# Altium PCB Main_Board.PcbDoc
Units mm, origin at the board's own origin, x right, y up, seen from the top; angles counter-clockwise.
Board outline 40 x 45.99 mm, 4 copper layers (L1, PWR, GND, L4), stack 0.603 mm thick; 55 components, 45 nets, 223 pads, 78 vias.
Unrouted connection lines stored in the file: 2.
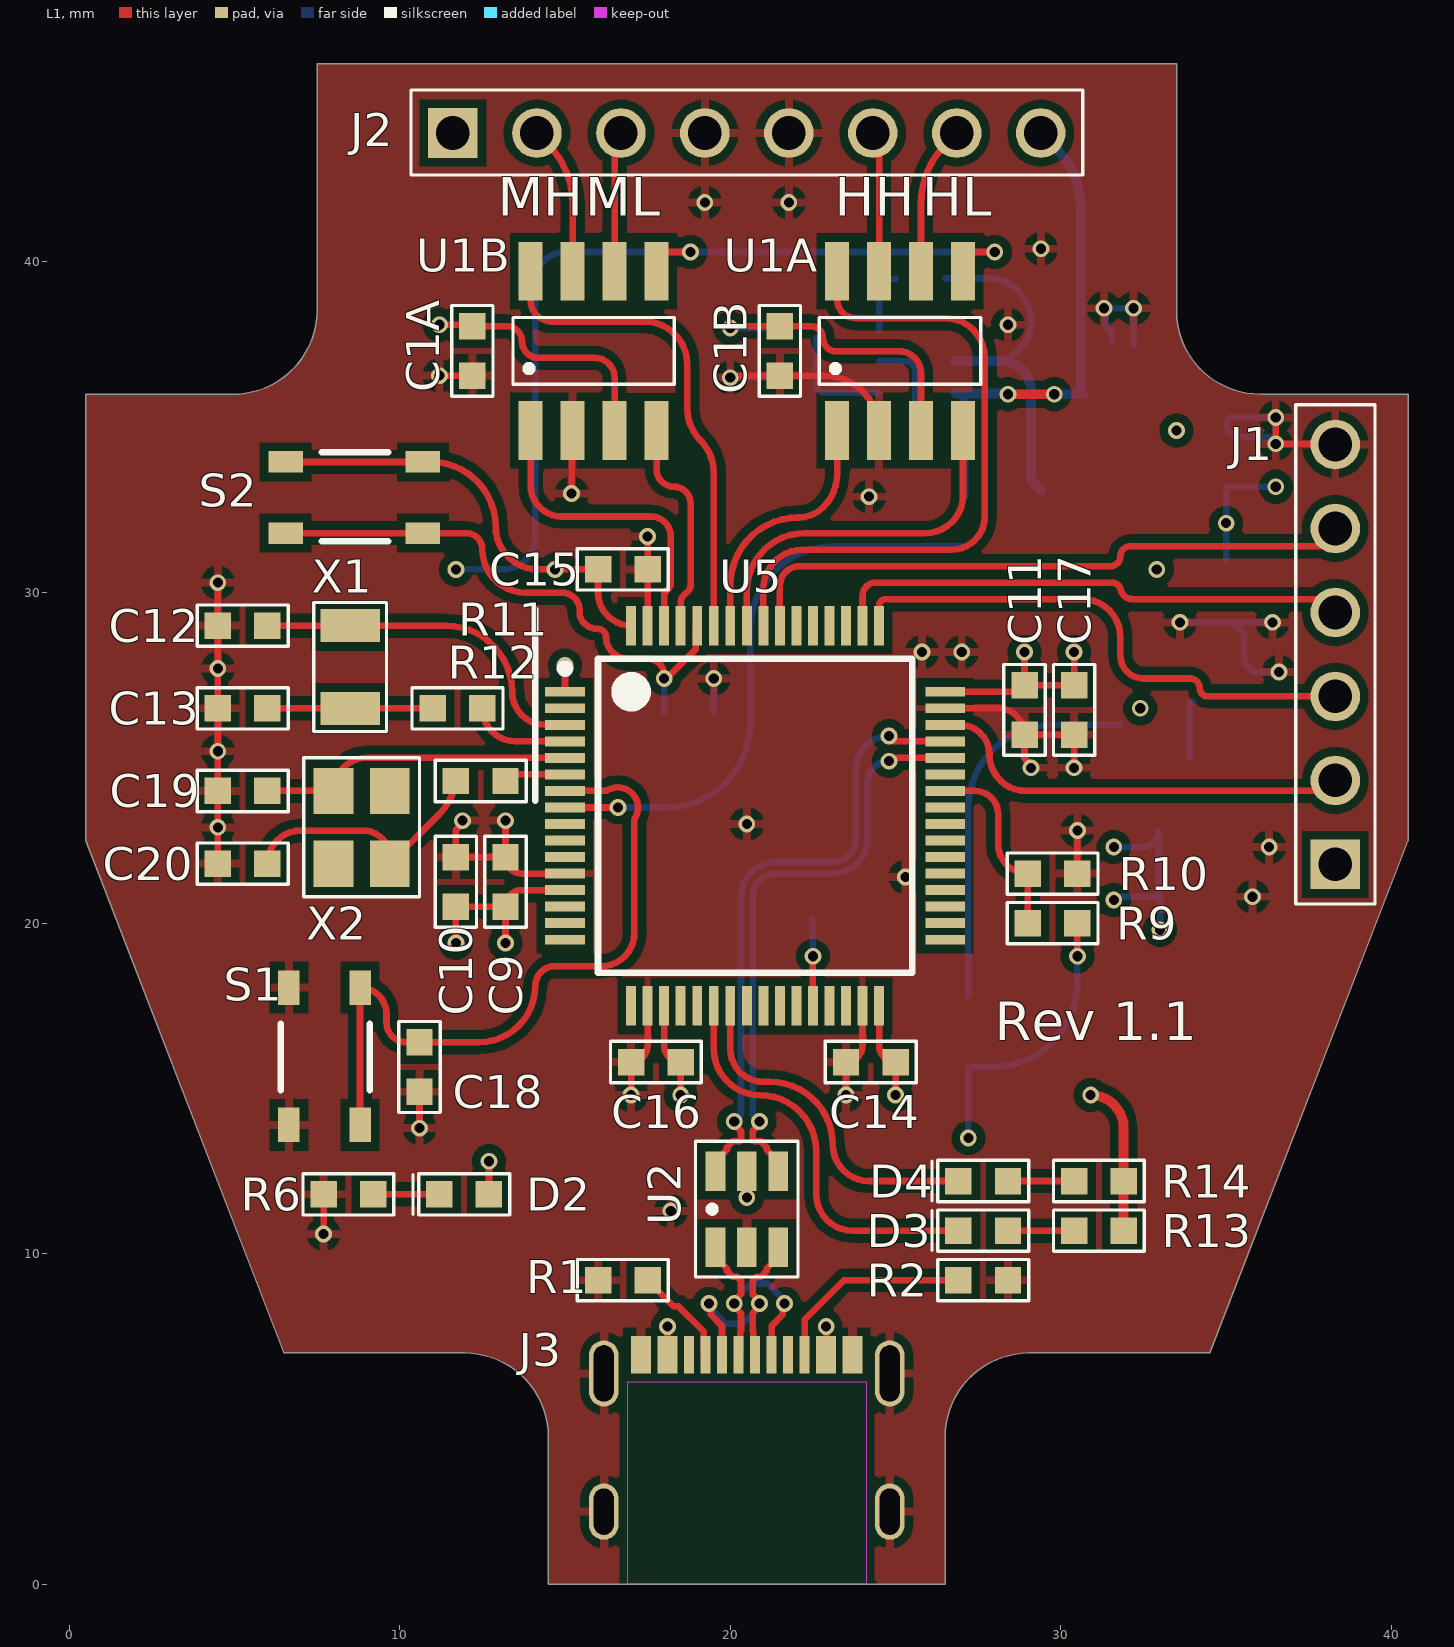
[diagram p0: L1 view]
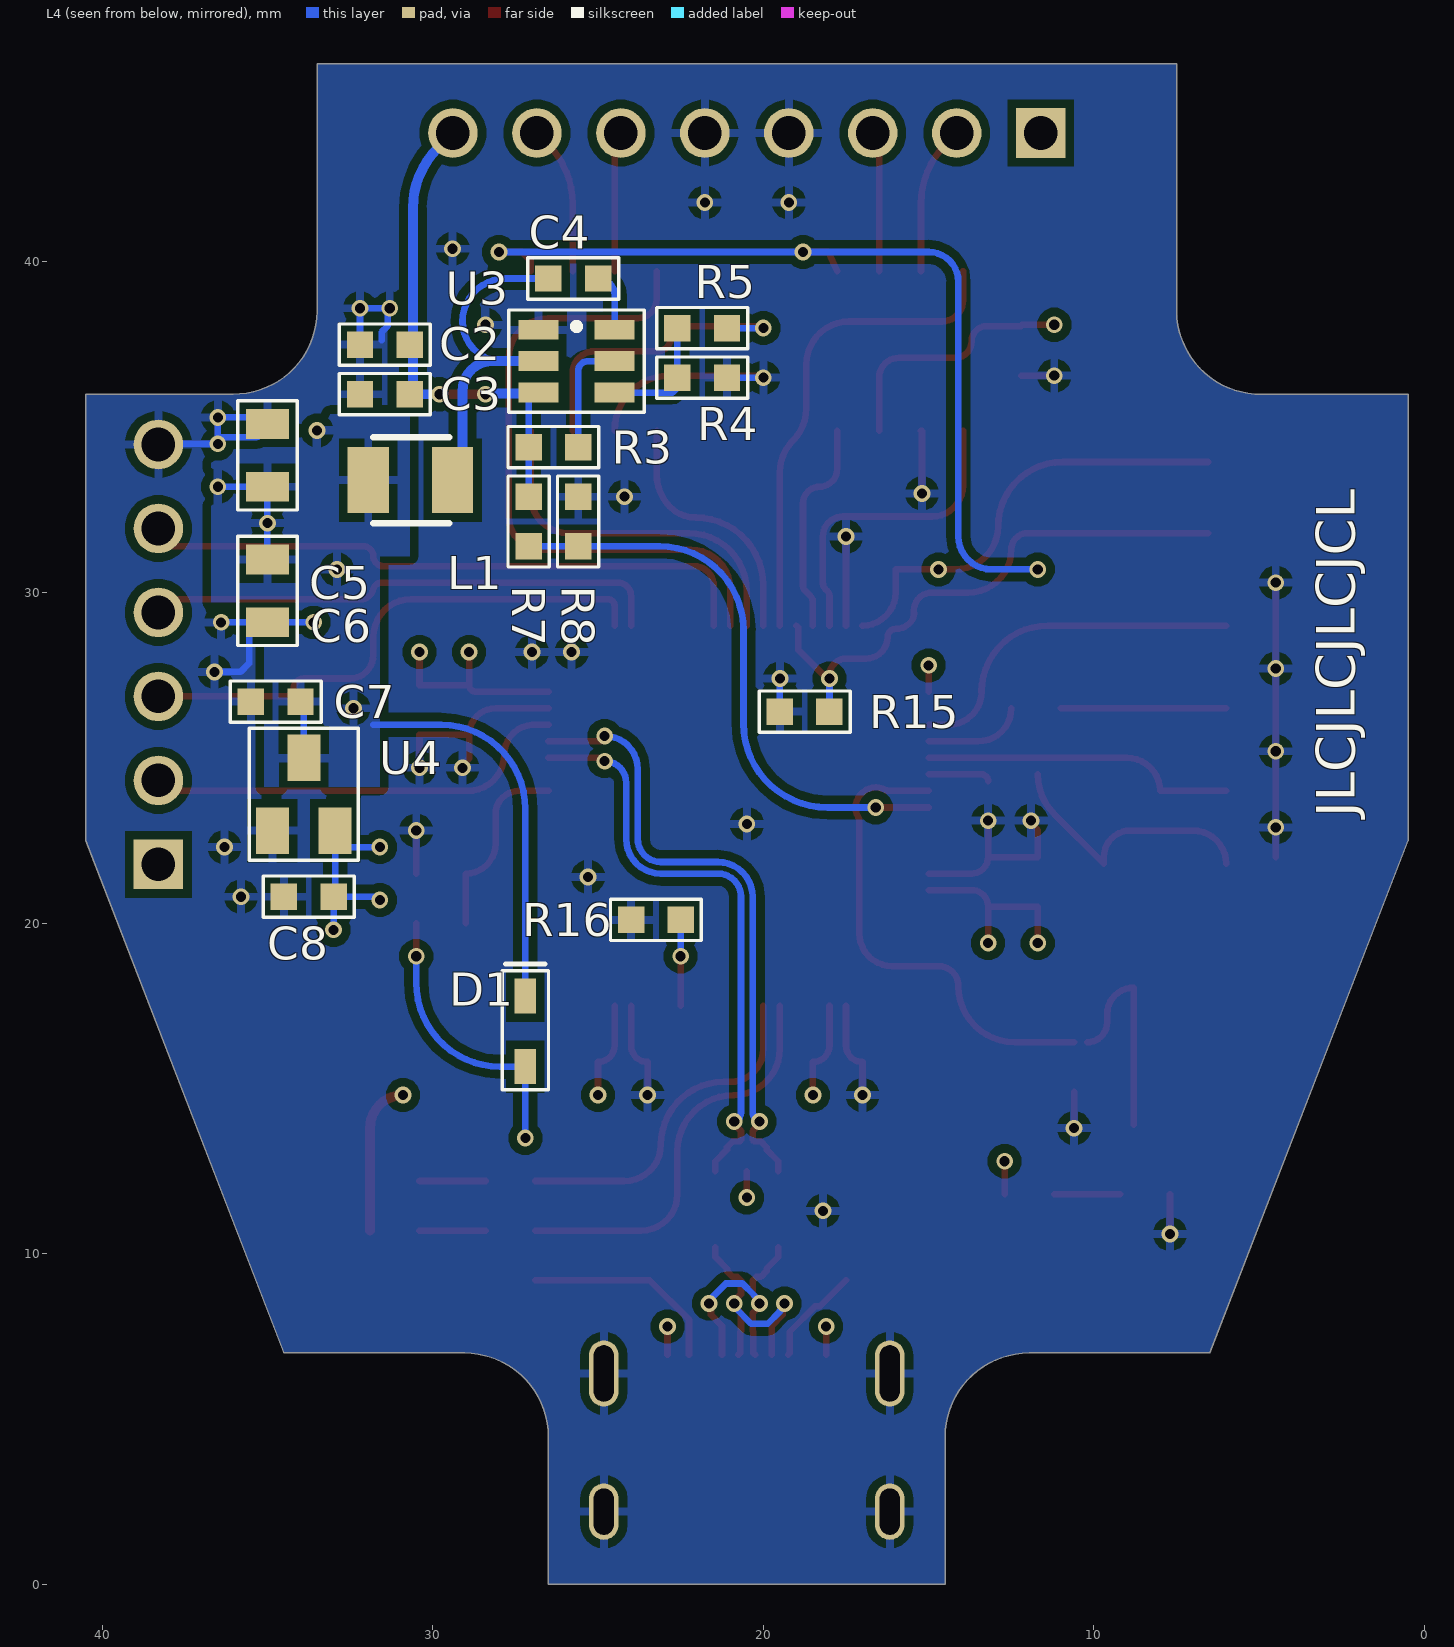
[diagram p1: L4 view, seen from below]
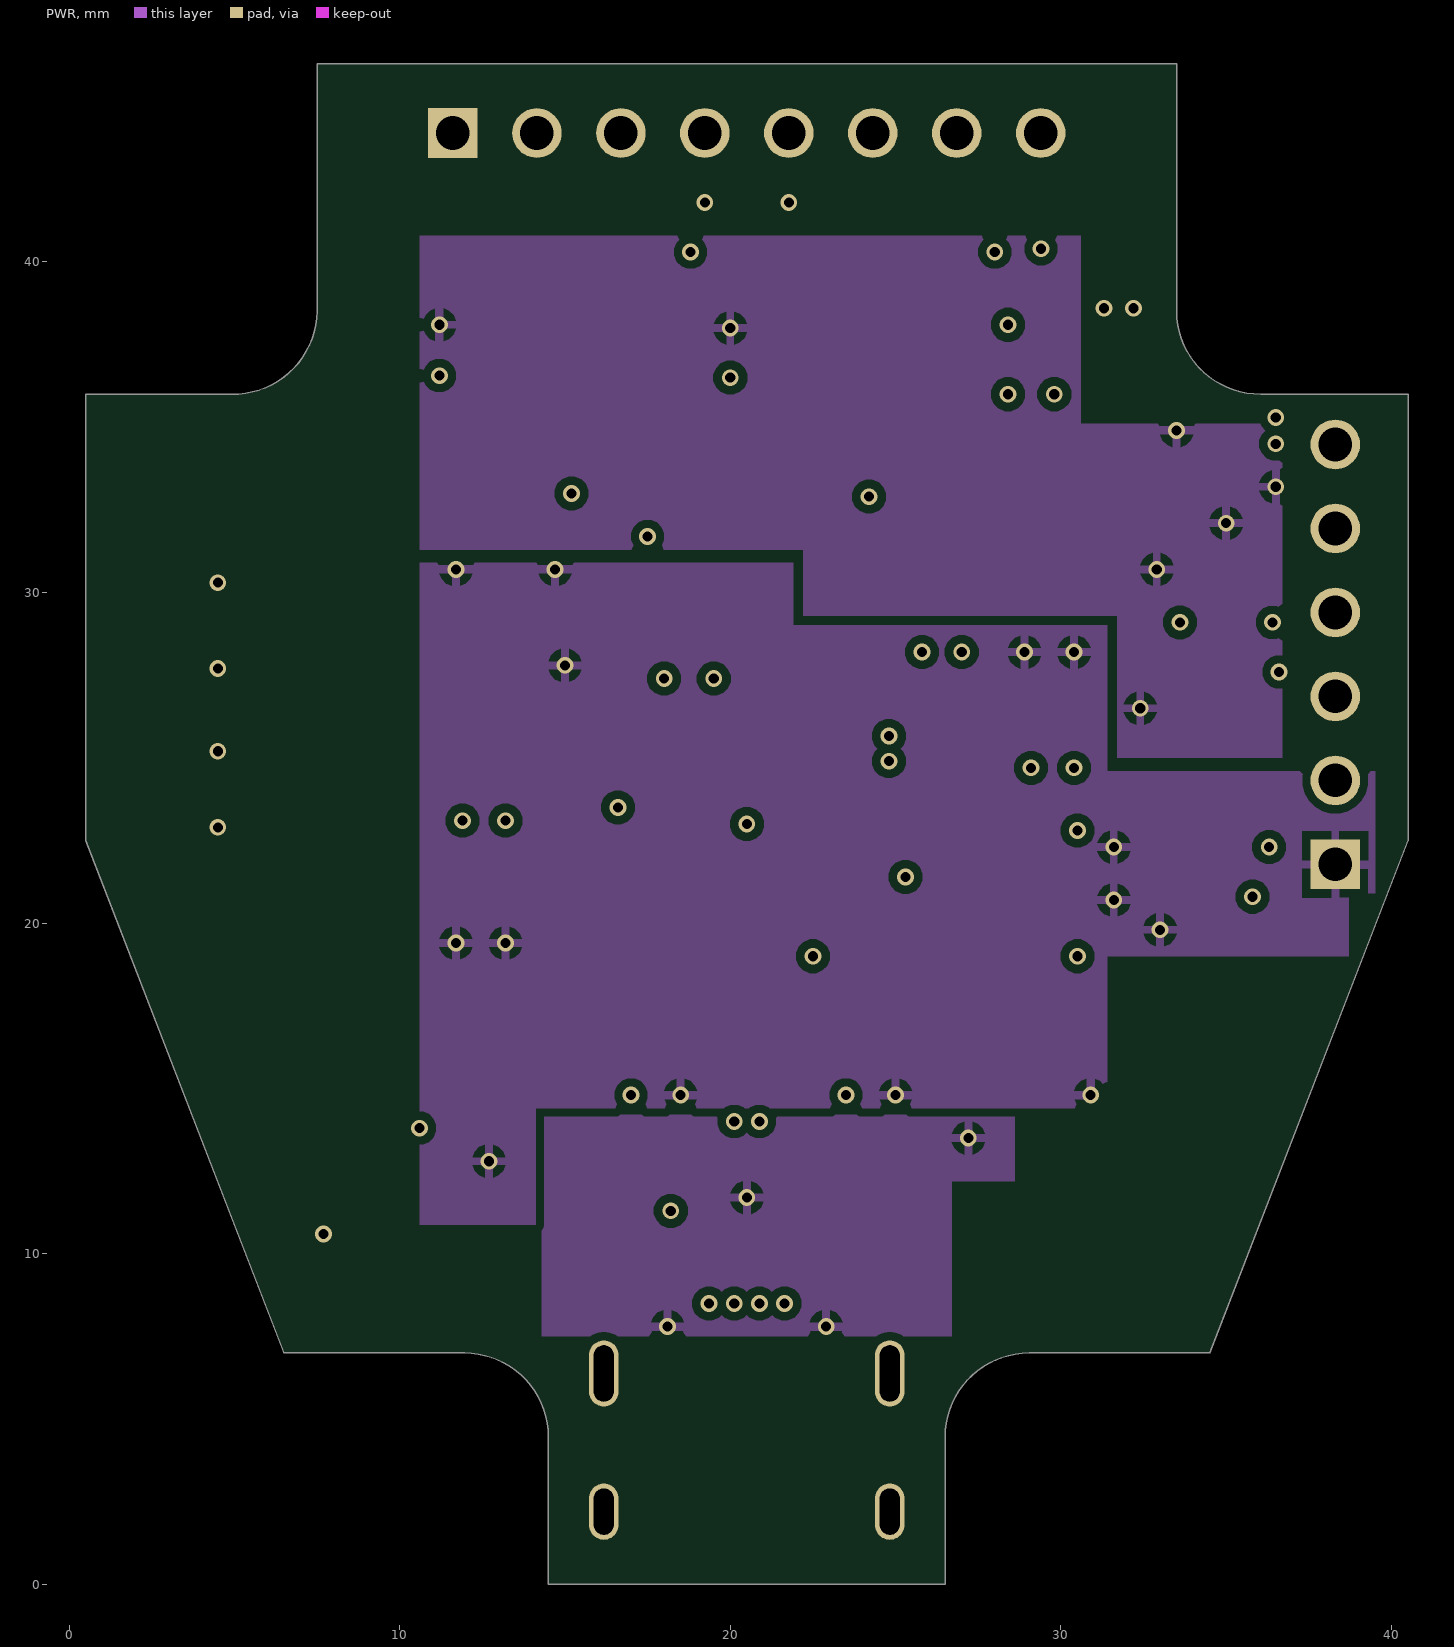
[diagram p2: PWR]
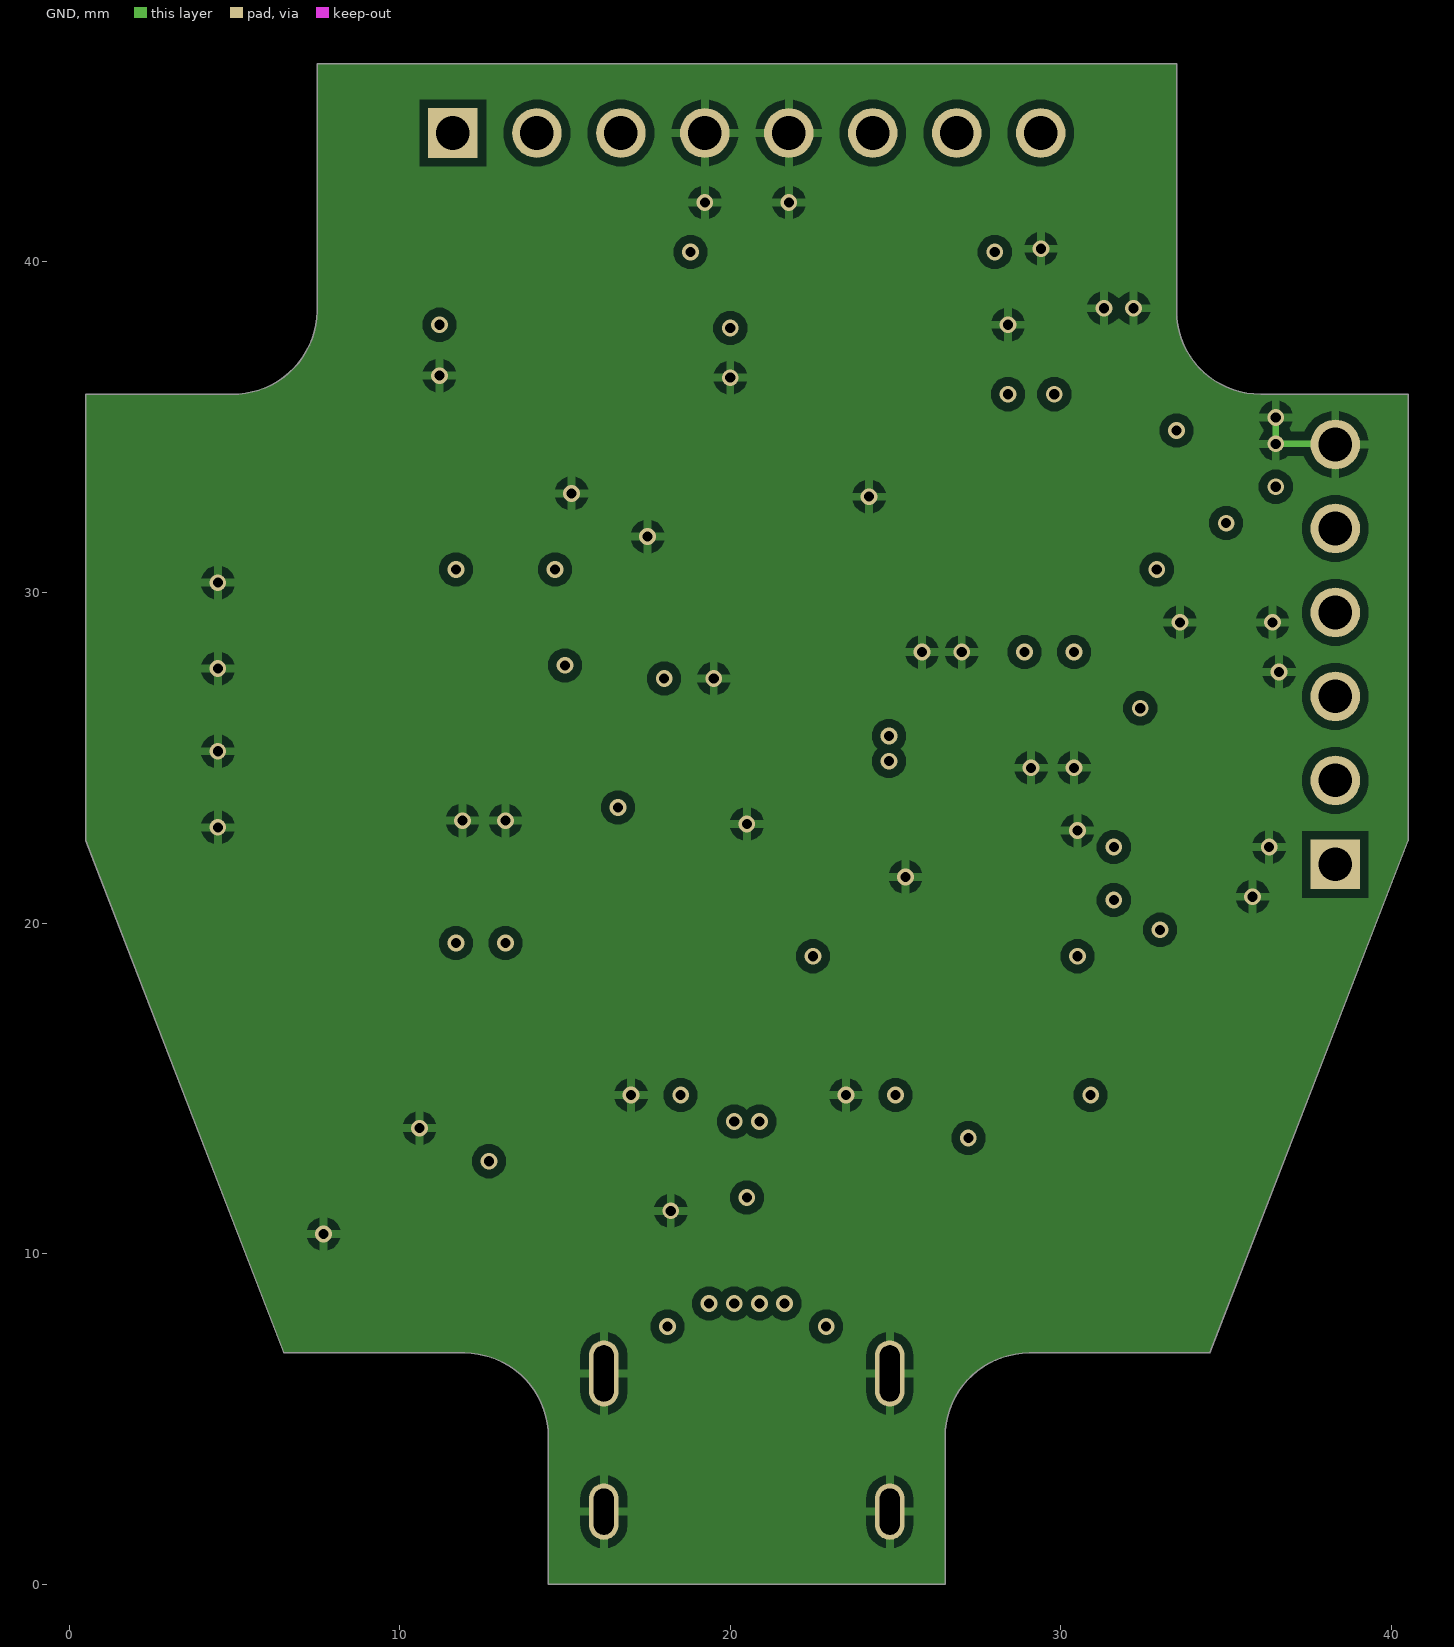
[diagram p3: GND]
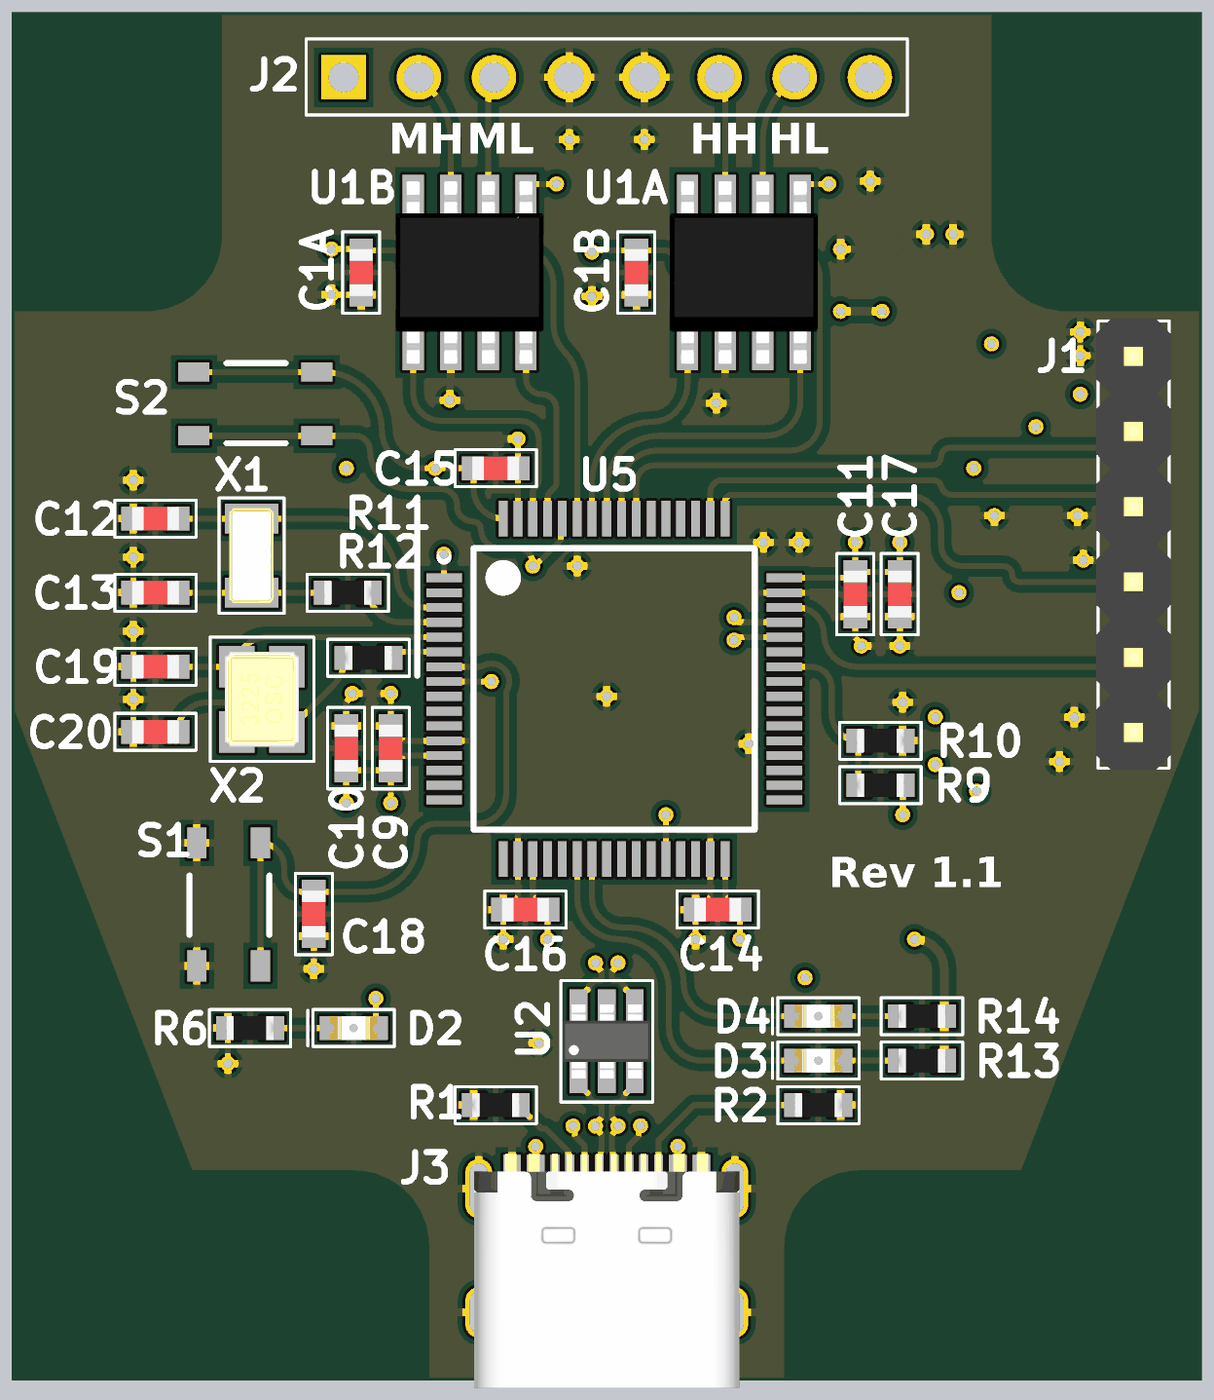
[diagram p4: 3D render of the assembled board from above, using the file's embedded part models]
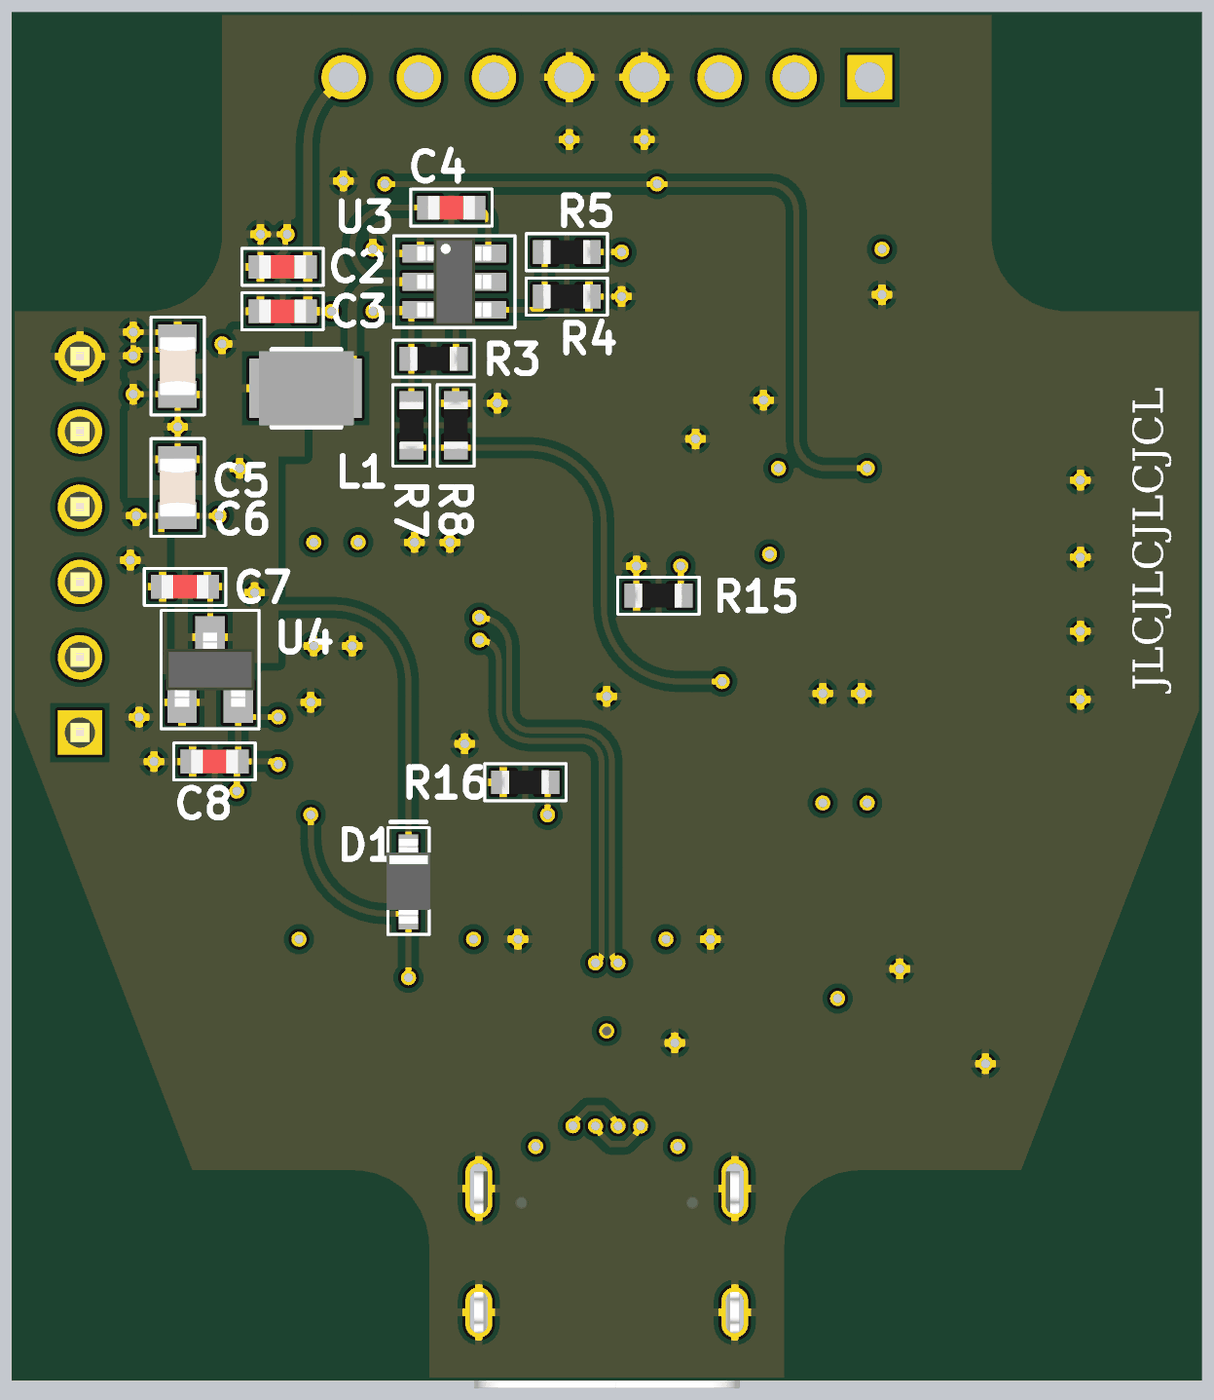
[diagram p5: 3D render of the assembled board from below, using the file's embedded part models]

## Layer stack, top to bottom
Top Solder: solder mask 0.0102, Solder Resist, Dk 3.5
L1: signal copper 0.0356
Dielectric 2: prepreg 0.0711, PP-006, Dk 4.1
PWR: signal copper 0.035
Dielectric 1: core 0.32, FR-4, Dk 4.8
GND: signal copper 0.035
Dielectric 3: prepreg 0.0711, PP-006, Dk 4.1
L4: signal copper 0.0356
Bottom Solder: solder mask 0.0102, Solder Resist, Dk 3.5

## Board outline
26.5,3.2 26.5,4.46 cw(c29.04,4.46) 29.04,7 29.9,7 34.5,7 40.5,22.5 40.5,36 36.04,36 cw(c36.023,38.523) 33.5,38.506 33.5,46 7.5,46 7.5,38.506 cw(c4.96,38.54) 4.926,36 0.5,36 0.5,22.5 6.5,7 10.7,7 11.96,7 cw(c11.96,4.46) 14.5,4.46 14.5,2.6 14.5,0.006 26.5,0.006

## Design rules (kind name [scope] priority, off if disabled: settings)
Clearance [All] p1: gap=0.254 ignorepadtopadclearanceinfootprint=TRUE except(0: Arc-Hole Track-Hole SMDPad-Hole THPad-Hole Via-Hole Fill-Hole Poly-Hole Region-Hole Text-Hole; 0.09: Arc-Arc Arc-Track Track-Track; 0.127: SMDPad-SMDPad; 0.2: Arc-SMDPad Arc-THPad Arc-Fill Track-SMDPad Track-THPad Track-Fill SMDPad-Fill THPad-Fill Via-Fill Fill-Fill; 0.33: SMDPad-THPad; 0.5: THPad-THPad)
DiffPairsRouting [All] p1: maxlimit=0.254 minlimit=0.1 mostfreqgap=0.15 toplayer_minwidth=0.1 toplayer_maxwidth=0.381 toplayer_prefwidth=0.15 midlayer1_minwidth=0.1 midlayer1_maxwidth=0.381 midlayer1_prefwidth=0.15 midlayer2_minwidth=0.1 midlayer2_maxwidth=0.381 midlayer2_prefwidth=0.15 bottomlayer_minwidth=0.1 bottomlayer_maxwidth=0.381 bottomlayer_prefwidth=0.15 maxuncoupledlength=12.7
MinimumSolderMaskSliver [All] p1: minsoldermaskwidth=0.2
PolygonConnect [All] p1: connectstyle=Relief reliefconductorwidth=0.254 reliefentries=4 polygonreliefangle="90 Angle" airgapwidth=0.254
RoutingVias [All] p1: holewidth=0.254 width=0.457 viastyle="Through Hole" minholewidth=0.2 minwidth=0.4 maxholewidth=6.3 maxwidth=1.27
SilkToSilkClearance [All] p1: silktosilkclearance=0.1
SilkToSolderMaskClearance [IsPad] p1: minsilkscreentomaskgap=0.2 clearancetoexposedcopper=TRUE
SolderMaskExpansion [All] p1: expansion=0.1 istentingtop=FALSE
Width [All] p1: maxlimit=1 minlimit=0.09 preferedwidth=0.2
26 further rules are at their usual default settings.

## Classes and differential pairs
channel class "CAN Interface": CAN_Interface1 CAN_Interface2
component class USB: J3 R1 R2 U2
component class "Power Supply": C2 C3 C4 C5 C6 C7 C8 D1 D2 L1 R3 R4 R5 R6 U3 U4
component class Microcontroller: 32 C9 C10 C11 C12 C13 C14 C15 C16 C17 C18 C19 C20 D3 D4 R7 R8 R9 R10 R11 R12 R13 R14 R15 R16 S1 S2 U5 X1 X2
component class J1962: J2
component class "Debug Interface": J1
component class CAN_Interface1: C1A U1A
component class CAN_Interface2: C1B U1B
differential pair USB_DU: +USB_DU_P -USB_DU_N
differential pair USB_D: +USB_D_P -USB_D_N

## Components (designator, comment, footprint, x,y, rotation, side; value= is the part's Value field where it differs from the comment)
C1A "100 nF" "0603 SMD CAP" 12.2,36.56 r90 top (schematic designator C1)
C1B "100 nF" "0603 SMD CAP" 21.5,36.56 r90 top (schematic designator C1)
C2 "10 uF" "0603 SMD CAP" 32.2,37.5 r180 bottom
C3 "10 uF" "0603 SMD CAP" 32.2,36 r180 bottom
C4 "100 nF" "0603 SMD CAP" 25,39.5 r0 bottom
C5 "22 uF" "0805 SMD Cap" 35,35.1 r270 bottom
C6 "22 uF" "0805 SMD Cap" 35,29.1 r90 bottom
C7 "1 uF" "0603 SMD CAP" 35.5,26.7 r180 bottom
C8 "1 uF" "0603 SMD CAP" 34.5,20.8 r180 bottom
C9 "100 nF" "0603 SMD CAP" 13.2,22 r270 top
C10 "1 uf" "0603 SMD CAP" 11.7,22 r270 top
C11 "100 nF" "0603 SMD CAP" 28.9,25.7 r90 top
C12 "3 pF" "0603 SMD CAP" 4.5,29 r0 top
C13 "3 pF" "0603 SMD CAP" 4.5,26.5 r0 top
C14 "100 nF" "0603 SMD CAP" 23.5,15.8 r0 top
C15 "100 nF" "0603 SMD CAP" 17.5,30.7 r180 top
C16 "100 nF" "0603 SMD CAP" 17,15.8 r0 top
C17 "1 uf" "0603 SMD CAP" 30.4,25.7 r90 top
C18 "100 nF" "0603 SMD CAP" 10.6,16.4 r270 top
C19 "15 pF" "0603 SMD CAP" 6,24 r180 top
C20 "15 pF" "0603 SMD CAP" 6,21.8 r180 top
D1 "Diode Shottky SOD-323" SOD-323 27.2,15.66 r90 bottom
D2 "LED White" "0603 SMD LED" 12.7,11.8 r180 top
D3 "LED Green 0603" "0603 SMD LED" 28.4,10.7 r180 top
D4 "LED Blue 0603" "0603 SMD LED" 28.4,12.2 r180 top
J1 "2.54 6x1" PLS-6x1 38.3,21.78 r180 top
J2 "2.54 8x1" PLS-8X1 11.61,43.9 r90 top
J3 "TYPE-C-31-M-12" TYPE-C-31-M-12 20.5,6.95 r0 top
L1 "3.3 uH" "1210 Inductor SMD" 29.4,33.4 r0 bottom
R1 "5.1k" "0603 SMD Res" 16,9.2 r0 top
R2 "5.1k" "0603 SMD Res" 28.4,9.2 r180 top
R3 "10k" "0603 SMD Res" 25.6,34.4 r0 bottom
R4 "10k" "0603 SMD Res" 21.1,36.5 r0 bottom
R5 "54.9k" "0603 SMD Res" 21.1,38 r0 bottom
R6 "698" "0603 SMD Res" 9.2,11.8 r180 top
R7 "10k" "0603 SMD Res" 27.1,31.4 r90 bottom
R8 "2.4k" "0603 SMD Res" 25.6,32.9 r270 bottom
R9 "33k" "0603 SMD Res" 29,20 r0 top
R10 "82k" "0603 SMD Res" 30.5,21.5 r180 top
R11 "0" "0603 SMD Res" 12.5,26.5 r180 top
R12 "0" "0603 SMD Res" 11.7,24.3 r0 top
R13 "698" "0603 SMD Res" 30.4,10.7 r0 top
R14 "698" "0603 SMD Res" 30.4,12.2 r0 top
R15 "10k" "0603 SMD Res" 19.5,26.4 r180 bottom
R16 "10k" "0603 SMD Res" 24,20.1 r180 bottom
S1 "Tactile SPST Switch" "Tactile Switch 4.2x3.4" 8.8,18.05 r270 top
S2 "Tactile SPST Switch" "Tactile Switch 4.2x3.4" 6.55,33.95 r0 top
U1A "TJA1051T" SOIC-8 23.23,34.9 r90 top (schematic designator U1)
U1B "TJA1051T" SOIC-8 13.96,34.9 r90 top (schematic designator U1)
U2 "USBLC6-2" SOT23-6L 19.55,10.2 r90 top
U3 "TPS563201" SOT23-6L 26.8,37.95 r180 bottom
U4 "XC6206P332MR" SOT23-3 34.85,22.8 r180 bottom
U5 "STM32F105RBT6" STM-LQFP64_V 20.75,23.25 r0 top
X1 "32.768MHz" "3215 SMD CRYSTAL" 8.5,26.5 r90 top
X2 "16MHz" "3225 SMD Crystal" 9.7,21.8 r90 top

## Footprints (in the part's own frame and the unit in brackets; to place one, negate y for a bottom-side part, rotate by r counter-clockwise, add the part's x,y. Pads: shape width x height; smd on the part's side, far side on the other; paste and mask are expansions set on the pad)
"0603 SMD CAP" [mm]
  rect 0.8x0.8 smd: 1(0,0) 2(1.5,0)
  silkscreen extent -0.63,-0.63 2.12,0.63, body extent -0.05,-0.4 1.55,0.4, height 0.3
"0603 SMD LED" [mm]
  rect 0.8x0.8 smd: 1(0,0) 2(1.5,0)
  silkscreen extent -0.63,-0.63 2.3,0.63, body extent -0.05,-0.4 1.55,0.4, height 0.55
"0603 SMD Res" [mm]
  rect 0.8x0.8 smd: 1(0,0) 2(1.5,0)
  silkscreen extent -0.63,-0.63 2.12,0.63, body extent -0.05,-0.4 1.55,0.4, height 0.45
"0805 SMD Cap" [mm]
  rect 0.9x1.3 smd: 1(0,0) 2(1.9,0)
  silkscreen extent -0.7,-0.9 2.6,0.9, body extent -0.05,-0.63 1.95,0.63, height 0.81
"1210 Inductor SMD" [mm]
  rect 1.25x2 smd: 1(0,0) 2(2.55,0)
  silkscreen extent 0.1,-1.3 2.4,1.3, body extent -0.35,-1.25 2.85,1.25, height 1.7
"3215 SMD CRYSTAL" [mm]
  rect 1x1.8 smd: 1(0,0) 2(2.5,0)
  silkscreen extent -0.7,-1.1 3.2,1.1, body extent -0.35,-0.75 2.85,0.75, height 0.9
"3225 SMD Crystal" [mm]
  rect 1.4x1.2 smd: 1(0,0) 2(2.2,0) 3(2.2,1.7) 4(0,1.7)
  silkscreen extent -1,-0.9 3.2,2.6, body extent -0.5,-0.4 2.7,2.1, height 0.7
PLS-6x1 [mm]
  rect 1.5x1.5 hole 1.02: 1(0,0)
  round 1.5 hole 1.02: 2(0,-2.54) 3(0,-5.08) 4(0,-7.62) 5(0,-10.16) 6(0,-12.7)
  silkscreen extent -1.2,-13.9 1.2,1.2, body extent -1.27,-13.97 1.27,1.27, height 8.6
PLS-8X1 [mm]
  rect 1.5x1.5 hole 1.016: 1(0,0)
  round 1.5 hole 1.016: 2(0,-2.54) 3(0,-5.08) 4(0,-7.62) 5(0,-10.16) 6(0,-12.7) 7(0,-15.24) 8(0,-17.78)
  silkscreen extent -1.27,-19.05 1.3,1.27
SOD-323 [mm]
  rect 1.06x0.65 smd: 1(0,0) 2(2.14,0)
  silkscreen extent -0.7,-0.7 3.1,0.7, body extent -0.33,-0.75 2.53,0.75, height 1.16
SOIC-8 [mm]
  rect 1.78x0.72 smd: 1(0,0) 2(0,-1.27) 3(0,-2.54) 4(0,-3.81) 5(4.82,-3.81) 6(4.82,-2.54) 7(4.82,-1.27) 8(4.82,0)
  silkscreen extent 1.4,-4.35 3.42,0.54, body extent -0.67,-4.41 5.49,0.59, height 2
SOT23-3 [mm]
  rect 1x1.4 smd: 1(0,0) 2(1.9,0) 3(0.95,2.2)
  silkscreen extent -0.7,-0.9 2.6,3.1, body extent -0.55,-0.15 2.45,2.35, height 1.1
SOT23-6L [mm]
  rect 1.2x0.6 smd: 1(0,0) 2(0,-0.95) 3(0,-1.9) 4(2.3,-1.9) 5(2.3,-0.95) 6(2.3,0)
  silkscreen extent -0.9,-2.5 3.2,0.6, body extent -0.1,-2.45 2.4,0.55, height 1.1
STM-LQFP64_V [mm] "Thin QFP, 64-Leads, Body 10x10mm, Pitch 0.5mm, ST Recommended"
  rect 1.2x0.3 smd: 1(-5.75,3.75) 2(-5.75,3.25) 3(-5.75,2.75) 4(-5.75,2.25) 5(-5.75,1.75) 6(-5.75,1.25) 7(-5.75,0.75) 8(-5.75,0.25) 9(-5.75,-0.25) 10(-5.75,-0.75) 11(-5.75,-1.25) 12(-5.75,-1.75) 13(-5.75,-2.25) 14(-5.75,-2.75) 15(-5.75,-3.25) 16(-5.75,-3.75) 33(5.75,-3.75) 34(5.75,-3.25) 35(5.75,-2.75) 36(5.75,-2.25) 37(5.75,-1.75) 38(5.75,-1.25) 39(5.75,-0.75) 40(5.75,-0.25) 41(5.75,0.25) 42(5.75,0.75) 43(5.75,1.25) 44(5.75,1.75) 45(5.75,2.25) 46(5.75,2.75) 47(5.75,3.25) 48(5.75,3.75)
  rect 0.3x1.2 smd: 17(-3.75,-5.75) 18(-3.25,-5.75) 19(-2.75,-5.75) 20(-2.25,-5.75) 21(-1.75,-5.75) 22(-1.25,-5.75) 23(-0.75,-5.75) 24(-0.25,-5.75) 25(0.25,-5.75) 26(0.75,-5.75) 27(1.25,-5.75) 28(1.75,-5.75) 29(2.25,-5.75) 30(2.75,-5.75) 31(3.25,-5.75) 32(3.75,-5.75) 49(3.75,5.75) 50(3.25,5.75) 51(2.75,5.75) 52(2.25,5.75) 53(1.75,5.75) 54(1.25,5.75) 55(0.75,5.75) 56(0.25,5.75) 57(-0.25,5.75) 58(-0.75,5.75) 59(-1.25,5.75) 60(-1.75,5.75) 61(-2.25,5.75) 62(-2.75,5.75) 63(-3.25,5.75) 64(-3.75,5.75)
  silkscreen extent -5.87,-4.75 4.75,4.75, body extent -5,-5 5,5, height 1.6
"Tactile Switch 4.2x3.4" [mm]
  rect 1.05x0.65 smd: 1(0,0) 2(4.15,0) 3(0,-2.15) 4(4.15,-2.15)
  silkscreen extent 1.1,-2.4 3.1,0.3, body extent -0.22,-2.67 4.37,0.53, height 2.5
TYPE-C-31-M-12 [mm]
  rect 0.6x1.14 smd: 1(-3.2,0) 2(-2.4,0) 11(2.4,0) 12(3.2,0)
  rect 0.3x1.14 smd: 3(-1.75,0) 4(-1.25,0) 5(-0.75,0) 6(-0.25,0) 7(0.25,0) 8(0.75,0) 9(1.25,0) 10(1.75,0)
  oval 0.9x2 hole 0.6 slot 1.7 at 90 deg: 13(-4.325,-0.57) 15(4.325,-0.57)
  oval 0.9x1.7 hole 0.6 slot 1.4 at 90 deg: 14(-4.325,-4.75) 16(4.325,-4.75)
  body extent -4.47,-7.3 4.47,0.6, height 3.16

## Part data
C1A C1B C4 C9 C11 C14 C15 C16 C18: library part "Cap 100nF 0603", "25V 100nF X7R ±10% 0603 Multilayer Ceramic Capacitors MLCC", Part Number=CL10B104KA8NNNC, ComponentLink1Description=LCSC, ComponentLink1URL=https://lcsc.com/product-detail/Multilayer-Ceramic-Capacitors-MLCC-SMD-SMT_Samsung-Electro-Mechanics-CL10B104KA8NNNC_C1590.html
C2 C3: library part "Cap 10uf 0603", "25V 10uF X5R ±20% 0603 Multilayer Ceramic Capacitors", Part Number=CL10A106MA8NRNC
C5 C6: library part "Cap 22uF 0805", "25V 22uF X5R ±20% 0805 Multilayer Ceramic Capacitors", Part Number=CL21A226MAYNNNE
C7 C8 C10 C17: library part "Cap 1u 0603", "25V 1uF X5R ±10% 0603 Multilayer Ceramic Capacitors MLCC", Part Number=CC0603KRX5R8BB105
C12 C13: library part "Cap 3pF 0603", "50V 3pF NP0 0.25pF 0603 Multilayer Ceramic Capacitors MLCC", Part Number=CC0603JRNPO9BN100
C19 C20: library part "Cap 15pF 0603", "50V 15pF NP0 ±5% 0603 Multilayer Ceramic Capacitors MLCC", Part Number=CC0603JRNPO9BN100
D1: "20V 450mV@1A 1A SOD-323 Schottky Barrier Diodes", Part Number=B5817WS, ComponentLink1Description=LCSC, ComponentLink1URL=https://lcsc.com/product-detail/Schottky-Barrier-Diodes-SBD_Shandong-Jingdao-Microelectronics-B5817WS_C123899.html
D2: library part "LED White 0603", "5mA Yellow -40℃~+85℃ White light 120° 100mW 0603 Light Emitting Diodes (LED) ROHS", Part Number=SZYY0603W, ComponentLink1Description=Datasheet, ComponentLink1URL=https://datasheet.lcsc.com/lcsc/1912111437_Yongyu-Photoelectric-SZYY0603W_C434422.pdf
D3: "20mA 518nm Colorless transparence -40℃~+85℃ 520nm~535nm Emerald 120° 110mW 0603", Part Number=19-217/GHC-YR1S2/3T, ComponentLink1Description=Datasheet, ComponentLink1URL=https://datasheet.lcsc.com/lcsc/1811101510_Everlight-Elec-19-217-GHC-YR1S2-3T_C72043.pdf
D4: "25mA Green -30℃~+85℃ Positive post Blue 120° 80mW 0603", Part Number=XL-1608BGWC-06, ComponentLink1Description=Datasheet, ComponentLink1URL=https://datasheet.lcsc.com/lcsc/2211030000_XINGLIGHT-XL-1608BGWC-06_C965809.pdf
J1: library part "2.54mm 6x1"
J2: library part "2.54mm 8x1"
J3: library part "USB-C Receptable Top Mount TYPE-C-31-M-12", "5A 1 16 Female Type-C SMD USB Connectors ROHS", ComponentLink1Description=Datasheet, ComponentLink1URL=https://datasheet.lcsc.com/lcsc/2205251630_Korean-Hroparts-Elec-TYPE-C-31-M-12_C165948.pdf, Part Number=TYPE-C-31-M-12, Pin Count=12
L1: library part "Ind 3.3mH 1210", "1.55A 3.3uH ±30% 1.9A 100mΩ 1210 Inductors (SMD) ROHS", Part Number=LQH32PN3R3NNCL, ComponentLink1Description=Datasheet, ComponentLink1URL=https://datasheet.lcsc.com/lcsc/2108040830_Murata-Electronics-LQH32PN3R3NNCL_C2044639.pdf
R1 R2: library part "Resistor 5.1k 0603 1%", "Resistor 5.1k 0603 1%", Part Number=RC0603FR-075K1L, ComponentLink1Description=ChipDip, ComponentLink1URL=https://www.chipdip.ru/product/0.1w-0603-5.1-kom-1
R3 R4 R7 R15 R16: library part "Resistor 10k 0603 1%", "Resistor 10k 0603 1%", Part Number=RC0603FR-0710KL
R5: library part "Resistor 54.9k 0603 1%", "100mW Thick Film Resistors 75V ±100ppm/℃ ±1% -55℃~+155℃ 54.9kΩ 0603", Part Number=RC0603FR-0754K9L, ComponentLink1Description=LCSC, ComponentLink1URL=https://lcsc.com/product-detail/Chip-Resistor-Surface-Mount_YAGEO-RC0603FR-0754K9L_C185321.html
R6 R13 R14: library part "Resistor 698 0603 1%", "100mW Thick Film Resistors 75V ±100ppm/℃ ±1% -55℃~+155℃ 698Ω 0603 Chip Resistor", Part Number=AC0603FR-07698RL, ComponentLink1Description=LCSC, ComponentLink1URL=https://lcsc.com/product-detail/Chip-Resistor-Surface-Mount_YAGEO-AC0603FR-07698RL_C144640.html
R8: library part "Resistor 2.4k 0603 1%", "100mW Thick Film Resistors 75V ±100ppm/℃ ±1% -55℃~+155℃ 2.4kΩ 0603 Chip Resistor", Part Number=RC0603FR-072K4L
R9: library part "Resistor 33k 0603", "100mW Thin Film Resistor 75V ±25ppm/℃ ±1% -55℃~+155℃ 33kΩ 0603 Chip Resistor", Part Number=ARG03FTC3302, ComponentLink1Description=LCSC, ComponentLink1URL=https://lcsc.com/product-detail/Chip-Resistor-Surface-Mount_Viking-Tech-ARG03FTC3302_C217971.html
R10: library part "Resistor 82k 0603", "100mW Thick Film Resistors 50V ±100ppm/℃ ±1% -55℃~+155℃ 82kΩ 0603 Chip Resistor", Part Number=FRC0603F8202TS, ComponentLink1Description=LCSC, ComponentLink1URL=https://lcsc.com/product-detail/Chip-Resistor-Surface-Mount_FOJAN-FRC0603F8202TS_C2907072.html
R11 R12: library part "Resistor 0 0603", "Thick Film Resistors -55℃~+155℃ 0Ω 0603 Chip Resistor", Part Number="FRC0603P000 TS", ComponentLink1Description=LCSC, ComponentLink1URL=https://lcsc.com/product-detail/Chip-Resistor-Surface-Mount_FOJAN-FRC0603P000-TS_C2907080.html
S1 S2: Part Number=YTSA016C0254004B, ComponentLink1Description=Datasheet, ComponentLink1URL=https://datasheet.lcsc.com/lcsc/2106061735_DGBZ-YTSA016C0254004B_C2764970.pdf
U1A U1B: library part "CAN Transeiver TJA1051T", "TJA1051T CAN Transeiver up to 5 Mbaud/s", Part Number=TJA1051T,118, ComponentLink1Description=Datasheet, ComponentLink1URL=https://datasheet.lcsc.com/lcsc/1809192316_NXP-Semicon-TJA1051T-118_C18387.pdf
U2: library part "USB ESD Protection IC USBLC6-2", Part Number=USBLC6-2SC6
U3: library part "DC-DC Buck Converter TPS563201", "Step-down type -40℃~+125℃@(TJ) 1 Step-down Adjustable 0.768V~7V 3A 4.5V~17V 580kHz SOT-23-THIN-6", Part Number=TPS563201DDCR, ComponentLink1Description=Datasheet, ComponentLink1URL=https://www.ti.com/lit/ds/symlink/tps563201.pdf?ts=1668072977388
U4: library part "LDO 3V3 SOT-23-3", "40dB@(1kHz) 100mA 240mV@(50mA) Fixed 3.3V~3.3V Positive 1 8V SOT-23 Linear Voltage Regulators", ComponentLink1Description=Datasheet, ComponentLink1URL=https://static.chipdip.ru/lib/848/DOC018848972.pdf, Part Number=XC6206P332MR
U5: library part CMP-0237-00224-3, "ARM Cortex-M3 32-bit MCU, 128 KB Flash, 64 KB Internal RAM, 51 I/Os, 64-pin LQFP, -40 to 85 degC, Tray", I/Os (High Current)=51, Operating Frequency(F) (Processor speed) (MHz)=72, Supply Voltage(Vcc) min (V)=2, A/D Converter="2x12-bit (16 Channel)", ComponentLink1Description="Manufacturer URL", ComponentLink1URL=http://www.st.com/web/en/home.html, ComponentLink2Description=Datasheet, ComponentLink2URL=http://www.st.com/st-web-ui/static/active/en/resource/technical/document/datasheet/CD00220364.pdf, ComponentLink3Description="Package Specification", ComponentLink3URL=http://www.st.com/st-web-ui/static/active/en/resource/technical/document/datasheet/DM00037051.pdf, Core="ARM Cortex-M3", D/A Converter="2x12-bit (2 Channel)", DatasheetVersion="Rev. 6", FLASH Size (Prog) (kB)=128, Internal RAM Size (kB)=64, Mounting Technology="Surface Mount", PackageDescription="64-Pin Low Profile Quad Flat Package, 10 x 10 mm Body, 0.5 mm Pitch", PackageReference=LQFP64, PackageVersion="Rev. 4, 06/2013", Packing=Tray, PartNumber=STM32F105RBT6
X1: library part "Crystal 32.768MHz SMD", "32.768kHz 6pF 70kΩ ±20ppm -40℃~+85℃ SMD3215-2P Crystals ROHS", Part Number=NX3215SA-32.768K-STD-MUA-14, ComponentLink1Description=Datasheet, ComponentLink1URL=https://datasheet.lcsc.com/lcsc/1810171130_NDK-NX3215SA-32-768K-STD-MUA-14_C156244.pdf
X2: library part "Crystal 16MHz 3225", "Crystal 16MHz 12pf", ComponentLink1Description=ChipDip, ComponentLink1URL=https://www.chipdip.ru/product0/8010531849

## Via types
v1: diameter 0.508, hole 0.305, L1 to L4, 78 vias

## Nets (pads, with @x,y where several pads share a name; then routed paths per layer and width w, separated by ;. In a path a pad name is that pad's centre, name@x,y a point inside that pad or via, vN(x,y) a via of type N, cw(c..) or ccw(c..) an arc to the next point about the centre after c; other vN are vias at no path point)
+3V3: C8.2 C9.2 C10.2 C11.2 C14.2 C15.2 C16.2 C17.2 D2.1 J1.1 R13.2 R14.2 S2.1 S2.2 U1A.5 U1B.5 U4.2 U5.1 U5.13 U5.19 U5.32 U5.48 U5.64 | length 71.4
  L1 w0.2: S2.1 S2.2 10.95,33.95 cw(c10.95,32) 12.9,32 ccw(c14.2,32) 14.2,30.7 v1(14.7,30.7) C15.2 16,30 ccw(c17,30) U5.64 ; v1@11.7,19.6 C10.2 C9.2 ; D2.1 v1(12.7,12.8) ; v1@13.2,19.6 C9.2 ; U5.13 13.7,21 ccw(c13.7,20.5) C9.2 ; U5.1 v1(15,27.8) ; U1B.5 18.03,40.3 v1(18.8,40.3) ; U5.19 18,16.3 ccw(c18.5,16.3) C16.2 v1(18.5,14.8) ; U5.32 24.5,16.3 ccw(c25,16.3) C14.2 v1(25,14.8) ; U5.48 28.7,27 ccw(c28.7,27.2) C11.2 ; U1A.5 27.04,40.04 27.3,40.3 v1(28,40.3) ; v1(28.9,28.2) C11.2 ; v1(30.4,28.2) C17.2 C11.2
  L1 w0.3: v1(30.9,14.8) cw(c30.9,13.8) 31.9,13.8 R14.2 R13.2
  L4 w0.2: v1(11.7,30.7) 13.1,30.7 ccw(c13.1,31.7) 14.1,31.7 14.1,39.4 cw(c15,39.4) 15,40.3 v1(18.8,40.3) v1(28,40.3) ; v1(31.6,20.7) cw(c31.7,20.7) 31.7,20.8 C8.2 ; v1(31.6,22.3) 32.45,22.3 ccw(c32.45,22.8) U4.2 32.95,20.85 ccw(c33,20.85) C8.2 ; v1(33,19.8) C8.2
  other v1: 11.7,19.4 13.2,19.4
+5V: C1A.2 C1B.2 C5.2 C6.2 C7.2 D1.2 L1.2 R5.1 U1A.3 U1B.3 U4.3 | length 34.4
  L1 w0.2: v1(11.2,38.1) 12.16,38.1 cw(c12.16,38.06) C1A.2 13.24,38.06 cw(c13.24,37.6) 13.7,37.6 ccw(c14.2,37.6) 14.2,37.1 15.9,37.1 cw(c15.9,36.5) 16.5,36.5 U1B.3 ; v1(20,38) cw(c20.06,38) 20.06,38.06 C1B.2 22.44,38.06 cw(c22.44,37.7) 22.8,37.7 ccw(c23.2,37.7) 23.2,37.3 25.1,37.3 cw(c25.1,36.63) 25.77,36.63 U1A.3
  L4 w0.2: v1(20,38) R5.1 ; D1.2 27.2,23.46 cw(c29.74,23.46) 29.74,26 31.8,26 ; U4.3 33.9,26.6 cw(c34,26.6) C7.2 ; C6.2 v1(35,32.1) C5.2 v1(36.5,33.2)
  other v1: 32.4,26.5 32.9,30.7 33.5,34.9
+5V_USB: D1.1 J3.2 J3.11 R9.2 U2.5 | length 11.2
  L1 w0.2: J3.2 v1(18.1,7.8) ; v1(20.5,11.7) U2.5 ; J3.11 v1(22.9,7.8) ; v1(30.5,19) R9.2
  L4 w0.2: v1(27.2,13.5) D1.1 27.96,15.66 ccw(c27.96,18.2) 30.5,18.2 v1(30.5,19)
+12V: C2.2 C3.2 J2.8 R3.2 R7.2 U3.3 | length 15.5
  L1 w0.3: v1(28.4,36) v1(29.8,36)
  L4 w0.2: U3.3 26.9,36.05 26.925,36.025 27.1,35.85 R3.2 R7.2
  L4 w0.3: U3.3 26.825,36.025 26.925,36.025 28.375,36.025 v1(28.4,36) ; J2.8 29.856,43.434 cw(c28.06,41.638) 30.6,41.638 C3.2@30.6,36 ; v1(29.8,36) C3.2@30.6,36 ; C3.2 C3.2@30.6,36
BOOT0: R15.2 S2.3 S2.4 U5.60 | length 17.1
  L1 w0.2: S2.3 S2.4 12,31.8 cw(c12,31.3) 12.5,31.3 ccw(c13.8,31.3) 13.8,30 14.9,30 cw(c14.9,29.451) 15.448,29.472 cw(c15.249,29.464) 15.447,29.439 ccw(c15.861,29.382) 15.543,29.112 ccw(c16,29.5) 16,28.9 cw(c16,28.659) 16.241,28.661 ; U5.60 18.95,28.95 18.95,28.276 18.074,27.4 v1(18,27.4) 18,27.5 ccw(c17.5,27.5) 17.5,28 16.902,28 cw(c16.902,28.661) 16.241,28.657 ; 16.241,28.657 cw(c16.902,28.661) 16.241,28.661 ; 16.241,28.657 16.241,28.661
  L4 w0.2: R15.2 v1(18,27.4)
BOOT1: R16.2 U5.28 | length 2.6
  L1 w0.2: U5.28 v1(22.5,19)
  L4 w0.2: v1(22.5,19) R16.2
CAN1_RX: U1B.4 U5.61 | length 6.6
  L1 w0.2: U1B.4 17.77,33.73 ccw(c18.3,33.73) 18.3,33.2 cw(c18.3,32.7) 18.8,32.7 18.8,30.207 cw(c18.6,30.207) 18.742,30.066 18.588,29.912 ccw(c18.8,29.7) 18.5,29.7 U5.61
CAN1_TX: U1B.1 U5.62 | length 9.5
  L1 w0.2: U1B.1 13.96,33.24 ccw(c14.9,33.24) 14.9,32.3 17.6,32.3 cw(c17.6,31.7) 18.2,31.7 18.2,30.3 cw(c17.9,30.3) 18.079,30.06 ccw(c18.2,29.9) 18,29.901 U5.62
CAN1_TXE: U1B.8 U5.59 | length 14.8
  L1 w0.2: U1B.8 13.96,38.84 ccw(c14.6,38.84) 14.6,38.2 17.4,38.2 cw(c17.4,36.9) 18.7,36.9 18.7,35.566 ccw(c20.066,35.566) 19.1,34.6 cw(c18.134,33.634) 19.5,33.634 U5.59
CAN2_RX: U1A.4 U5.57 | length 11.2
  L1 w0.2: U5.57 20.5,30.039 cw(c22.261,30.039) 22.261,31.8 25.9,31.8 ccw(c25.9,32.94) 27.04,32.94 U1A.4
CAN2_TX: U1A.1 U5.58 | length 7.7
  L1 w0.2: U5.58 20,30.219 cw(c22.051,30.219) 22.05,32.27 ccw(c22.051,33.356) 22.819,32.589 ccw(c21.827,33.58) 23.23,33.58 ; 23.23,33.581 U1A.1
CAN2_TXE: U1A.8 U5.56 | length 20.2
  L1 w0.2: U5.56 21,30.1 cw(c22.2,30.1) 22.2,31.3 26.7,31.3 ccw(c26.7,32.3) 27.7,32.3 27.7,37.1 ccw(c26.5,37.1) 26.5,38.3 23.8,38.3 cw(c23.8,38.87) 23.23,38.87 U1A.8
GND: C1A.1 C1B.1 C2.1 C3.1 C5.1 C6.1 C7.1 C8.1 C9.1 C10.1 C11.1 C12.1 C13.1 C14.1 C15.1 C16.1 C17.1 C18.2 C19.2 C20.2 J1.6 J2.4 J2.5 J3.1 J3.12 J3.13 J3.14 J3.15 J3.16 R1.1 R2.1 R4.1 R6.2 R8.1 R10.1 R15.1 R16.1 S1.3 S1.4 U1A.2 U1B.2 U2.2 U3.1 U4.1 U5.12 U5.18 U5.31 U5.47 U5.63 | length 62.5
  L1 w0.2: C20.2@4.5,22 v1(4.5,22.9) C19.2 v1(4.5,25.2) C13.1 v1(4.5,27.7) C12.1 v1(4.5,30.3) ; v1(7.7,10.6) R6.2 ; v1(10.6,13.8) C18.2 ; v1(11.2,36.56) C1A.1 ; v1(11.9,23.1) 11.9,23.017 11.7,22.817 C10.1 C9.1 ; v1(13.2,23.1) C9.1 ; U5.12 13.7,21.5 cw(c13.7,22) C9.1 ; 15.2,33.3 15.2,34.87 cw(c15.23,34.87) U1B.2 ; v1(17,14.8) C16.1 ccw(c17,16.3) 17.5,16.3 U5.18 ; U5.63 C15.1 v1(17.5,31.692) ; v1(20,36.5) cw(c20.06,36.5) 20.06,36.56 C1B.1 22.84,36.56 cw(c22.84,34.9) U1A.2 ; v1(23.5,14.8) C14.1 ccw(c23.5,16.3) 24,16.3 U5.31 ; U5.47 28.1,26.5 cw(c28.1,25.7) C11.1 ; v1(29.1,24.7) 29.1,24.783 28.9,24.983 C11.1 ; v1(30.4,24.7) C17.1 C11.1 ; R10.1 30.5,22.5 ; v1(36.5,35.3) v1(36.5,34.5) 38.28,34.5 cw(c38.28,34.48) J1.6
  GND w0.2: v1(36.5,35.3) v1(36.5,34.5) 38.28,34.5 cw(c38.28,34.48) J1.6
  L4 w0.2: R15.1 v1(19.5,27.4) ; v1(20,36.5) R4.1 ; 31.546,37.627 31.546,37.878 31.359,38.065 31.359,38.541 v1(31.3,38.6) v1(32.2,38.6) C2.1 ; v1(33.6,29.1) C6.1 C6.1@35.2,29.1 ; v1(36.4,29.1) C6.1@35.2,29.1 ; v1(36.6,27.6) 35.817,27.6 35.55,27.867 35.55,28.75 C6.1@35.2,29.1 ; J1.6 ccw(c38.28,34.48) 38.28,34.5 v1(36.5,34.5) ; v1(36.5,34.5) ccw(c36.3,34.5) 36.3,34.7 35.4,34.7 cw(c35.4,35.1) C5.1 cw(c35.2,35.1) 35.2,35.3 v1(36.5,35.3) v1(36.5,34.5)
  other v1: 18.2,11.3 35.8,20.8 25.3,21.4 36.3,22.3 30.5,22.8 20.5,23 25.8,28.2 27,28.2 24.2,32.9 15.2,33 28.4,38.1 29.4,40.4 19.23,41.8 21.77,41.8
HS_CAN_H: J2.6 U1A.7 | length 4.2
  L1 w0.2: J2.6 cw(c23.851,43.441) 24.5,43.441 U1A.7
HS_CAN_L: J2.7 U1A.6 | length 4.5
  L1 w0.2: U1A.6 25.77,41.768 cw(c28.31,41.768) 26.514,43.564 J2.7
JTCK_SWCLK: J1.3 U5.49 | length 16.4
  L1 w0.2: U5.49 24.5,29.601 cw(c24.7,29.6) 24.699,29.8 30.655,29.8 cw(c30.655,28.655) 31.8,28.655 31.8,28.1 ccw(c32.5,28.1) 32.5,27.4 33.9,27.4 cw(c33.9,27.1) 34.2,27.1 ccw(c34.44,27.1) 34.44,26.86 J1.3
JTDI: J1.4 U5.50 | length 15.9
  L1 w0.2: U5.50 24,29.9 cw(c24.4,29.9) 24.4,30.3 31.548,30.3 cw(c31.548,30.042) 31.8,30.098 31.801,30.096 ccw(c32.174,30.183) 32.174,29.8 ; 32.175,29.8 37.9,29.8 cw(c37.9,29.4) J1.4
JTDO_SWO: J1.5 U5.55 | length 19
  L1 w0.2: U5.55 21.5,30.2 cw(c22.1,30.2) 22.1,30.8 31.5,30.8 ccw(c31.5,31.1) 31.8,31.1 cw(c32.1,31.1) 32.1,31.4 37.76,31.4 ccw(c37.76,31.94) J1.5
JTMS_SWDIO: J1.2 U5.46 | length 13.1
  L1 w0.2: U5.46 27,25.998 cw(c26.939,25.1) 27.839,25.1 ccw(c28.939,25.1) 28.939,24 37.98,24 ccw(c37.98,24.32) J1.2
MS_CAN_H: J2.2 U1B.7 | length 4.5
  L1 w0.2: J2.2 14.486,43.564 cw(c12.69,41.768) 15.23,41.768 U1B.7
MS_CAN_L: J2.3 U1B.6 | length 4.2
  L1 w0.2: U1B.6 16.5,43.441 cw(c17.149,43.441) J2.3
NetC4_1: C4.1 U3.6 | length 1.8
  L4 w0.2: U3.6 24.5,39 cw(c25,39) C4.1
NetC4_2: C4.2 L1.1 U3.2 | length 11.2
  L4 w0.2: C4.2 27.8,39.5 cw(c27.8,38.2) 29.1,38.2 cw(c27.9,38.2) 28.116,37.02 cw(c27.9,38.2) 27.9,37
  L4 w0.3: U3.2 27.88,37 27.9,37 28.2,37 cw(c28.2,36.1) 29.1,36.1 29.1,33.4 L1.1@29.4,33.1
NetC12_2: C12.2 U5.3 X1.2 | length 10.7
  L1 w0.2: C12.2 X1.2 11.4,29 cw(c11.4,27) 13.4,27 ccw(c14.4,27) 14.4,26 U5.3
NetC13_2: C13.2 R11.2 X1.1 | length 5
  L1 w0.2: C13.2 X1.1 R11.2
NetC19_1: C19.1 U5.5 X2.3 | length 9.6
  L1 w0.2: C19.1 X2.3 cw(c9,24) 9,25 U5.5
NetC20_1: C20.1 R12.1 X2.1 | length 8.4
  L1 w0.2: C20.1 cw(c7,21.8) 7,22.8 8.9,22.8 cw(c8.9,22) 9.7,22 X2.1 11.205,23.305 ccw(c10.01,24.5) R12.1@11.7,24.5
NetD2_2: D2.2 R6.1 | length 2
  L1 w0.2: R6.1 D2.2
NetD3_1: D3.1 R13.1 | length 2
  L1 w0.2: D3.1 R13.1
NetD4_1: D4.1 R14.1 | length 2
  L1 w0.2: D4.1 R14.1
NetR3_1: R3.1 U3.5 | length 3.6
  L4 w0.2: U3.5 25.3,37 cw(c25.3,36.7) 25.6,36.7 R3.1
NetR4_2: R4.2 R5.2 U3.4 | length 3.5
  L4 w0.2: R5.2@22.6,37.7 22.6,36.2 22.75,36.05 U3.4
NetR11_1: R11.1 U5.4 | length 3.1
  L1 w0.2: R11.1 ccw(c13.5,26.5) 13.5,25.5 U5.4
NetR12_2: R12.2 U5.6 | length 1.9
  L1 w0.2: R12.2 cw(c13.4,24.3) 13.4,24.5 U5.6
RESET: C18.1 S1.1 S1.2 U5.7 | length 21.4
  L1 w0.2: S1.2 S1.1 cw(c8.8,17.25) 9.6,17.25 9.6,17 ccw(c10.2,17) C18.1@10.2,16.4 ; C18.1 12.4,16.4 ccw(c12.4,18.1) 14.1,18.1 cw(c14.7,18.1) 14.7,18.7 16.1,18.7 ccw(c16.1,19.7) 17.1,19.7 17.1,23.096 cw(c17.3,23.096) 17.127,23.197 ccw(c16.6,23.5) 16.296,24.027 cw(c16.196,24.2) 16.196,24 U5.7
STATUS_LED1: D3.2 U5.22 | length 12.4
  L1 w0.2: U5.22 19.5,16.2 ccw(c20.9,16.2) 20.9,14.8 cw(c20.9,13.1) 22.6,13.1 22.6,11.8 ccw(c23.7,11.8) 23.7,10.7 D3.2
STATUS_LED2: D4.2 U5.23 | length 10.5
  L1 w0.2: U5.23 20,16.2 ccw(c21,16.2) 21,15.2 21.2,15.2 cw(c21.2,13.3) 23.1,13.3 ccw(c24.2,13.3) 24.2,12.2 D4.2
USB_CC1: J3.4 R1.2 | length 3.1
  L1 w0.2: R1.2 18.292,8.408 18.436,8.408 19.2,7.644 19.2,7 J3.4
USB_CC2: J3.10 R2.2 | length 6.2
  L1 w0.2: J3.10 22.25,8.01 23.44,9.2 R2.2
USB_D_N: U2.4 U5.44 | length 17.9
  L1 w0.2: v1(20.881,14) 20.881,13.917 20.675,13.711 20.675,13.446 20.721,13.4 20.924,13.4 21.1,13.224 21.1,13.15 21.45,12.8 U2.4 ; v1(24.8,24.9) cw(c24.9,24.9) 24.9,25 U5.44
  L4 w0.2: v1(20.881,14) cw(c20.902,14.199) 20.709,14.149 ccw(c20.119,14) 20.688,14.215 cw(c20.875,14.285) 20.675,14.284 20.675,20.8 cw(c21.375,20.8) 21.375,21.5 23.1,21.5 ccw(c23.1,22.55) 24.15,22.55 24.15,24.25 cw(c24.8,24.25) v1(24.8,24.9)
USB_D_P: U2.6 U5.45 | length 18.9
  L1 w0.2: U2.6 19.55,12.8 19.9,13.15 19.9,13.224 20.076,13.4 20.279,13.4 20.325,13.446 20.325,13.711 20.119,13.917 v1(20.119,14) ; v1(24.8,25.662) ccw(c24.962,25.662) 24.962,25.5 U5.45
  L4 w0.2: v1(20.119,14) ccw(c20.098,14.199) 20.292,14.149 cw(c20.881,14) 20.312,14.215 ccw(c20.125,14.285) 20.325,14.284 20.325,20.8 cw(c21.375,20.8) 21.375,21.85 23.1,21.85 ccw(c23.1,22.55) 23.8,22.55 23.8,24.662 cw(c24.8,24.662) v1(24.8,25.662)
USB_DU_N: J3.5 J3.7 U2.3 | length 7.7
  L1 w0.2: v1(19.357,8.492) 19.416,8.433 19.416,8.154 19.75,7.82 J3.5 ; J3.7 20.7,7 20.7,7.644 20.675,7.669 20.675,8.203 20.881,8.409 v1(20.881,8.492) 20.881,8.575 20.675,8.781 20.675,9.183 20.792,9.3 20.924,9.3 21.1,9.476 21.1,9.55 21.45,9.9 U2.3
  L4 w0.2: v1(19.357,8.492) 19.357,8.409 19.511,8.255 19.511,8.24 19.867,7.884 20.371,7.884 20.822,8.335 20.822,8.433 v1(20.881,8.492)
USB_DU_P: J3.6 J3.8 U2.1 | length 7.7
  L1 w0.2: U2.1 19.55,9.9 19.9,9.55 19.9,9.476 20.076,9.3 20.208,9.3 20.325,9.183 20.325,8.781 20.119,8.575 v1(20.119,8.492) 20.119,8.409 20.325,8.203 20.325,7.669 20.3,7.644 20.3,7 J3.6 ; J3.8 21.25,7.82 21.584,8.154 21.584,8.442 v1(21.643,8.5)
  L4 w0.2: v1(20.119,8.492) 20.119,8.575 20.273,8.729 20.273,8.744 20.629,9.1 21.133,9.1 21.584,8.649 21.584,8.559 v1(21.643,8.5)
USB_VBUS: R9.1 R10.2 U5.42 | length 5.8
  L1 w0.2: U5.42 27.4,24 cw(c27.4,23.3) 28.1,23.3 28.1,22.4 ccw(c29,22.4) R10.2 R9.1
V_SENSE: R7.1 R8.2 U5.8 | length 17.8
  L1 w0.2: U5.8 v1(16.6,23.5)
  L4 w0.2: v1(16.6,23.5) 18.06,23.5 ccw(c18.06,26.04) 20.6,26.04 20.6,28.86 cw(c23.14,28.86) 23.14,31.4 R8.2 R7.1
pads on no net: J2.1 J3.3 J3.9 U5.2 U5.9 U5.10 U5.11 U5.14 U5.15 U5.16 U5.17 U5.20 U5.21 U5.24 U5.25 U5.26 U5.27 U5.29 U5.30 U5.33 U5.34 U5.35 U5.36 U5.37 U5.38 U5.39 U5.40 U5.41 U5.43 U5.51 U5.52 U5.53 U5.54 X2.2 X2.4

## Polygon pours and split planes (outlines as drawn)
+3V3 on PWR "+3V3_L02_P001" (solid, pour order 1): 21.9,30.9 10.6,30.9 10.6,14.4 10.6,10.88 14.12,10.88 14.12,14.4 31.4,14.4 31.4,19 38.7,19 38.7,20.9 39.514,20.9 39.514,24.6 31.4,24.6 31.4,29.014 21.9,29.014
+5V on PWR "+5V_L02_P002" (solid, pour order 2): 36.7,35.1 36.7,25 31.7,25 31.7,29.3 22.2,29.3 22.2,31.3 10.6,31.3 10.6,40.8 30.6,40.8 30.6,35.1
+5V_USB on PWR "+5V_USB_L02_P007" (solid, pour order 7): 14.3,7.5 14.3,14.2 26.7,14.2 28.6,14.2 28.6,12.2 26.7,12.2 26.7,7.5
GND on L4 "GND_L04_P020" (solid, pour order 20): 26.5,3.2 26.5,4.46 cw(c29.04,4.46) 29.04,7 29.9,7 34.5,7 40.5,22.5 40.5,36 36.04,36 cw(c36.023,38.523) 33.5,38.506 33.5,46 7.5,46 7.5,38.506 cw(c4.96,38.54) 4.926,36 0.5,36 0.5,22.5 6.5,7 10.7,7 11.96,7 cw(c11.96,4.46) 14.5,4.46 14.5,2.6 14.5,0.006 26.5,0.006
+5V on L4 "+5V_L04_P003" (solid, pour order 3): 36.7,35.4 36.7,29.706 35.1,29.706 35.1,24.127 31.6,24.127 31.6,31.1 30.7,31.1 30.7,35.4
GND on L1 "GND_L01_P018" (solid, pour order 18): 26.5,3.2 26.5,4.46 cw(c29.04,4.46) 29.04,7 29.9,7 34.5,7 40.5,22.5 40.5,36 36.04,36 cw(c36.023,38.523) 33.5,38.506 33.5,46 7.5,46 7.5,38.506 cw(c4.96,38.54) 4.926,36 0.5,36 0.5,22.5 6.5,7 10.7,7 11.96,7 cw(c11.96,4.46) 14.5,4.46 14.5,2.6 14.5,0.006 26.5,0.006
GND on GND "GND_L03_P019" (solid, pour order 19): 26.5,3.2 26.5,4.46 cw(c29.04,4.46) 29.04,7 29.9,7 34.5,7 40.5,22.5 40.5,36 36.04,36 cw(c36.023,38.523) 33.5,38.506 33.5,46 7.5,46 7.5,38.506 cw(c4.96,38.54) 4.926,36 0.5,36 0.5,22.5 6.5,7 10.7,7 11.96,7 cw(c11.96,4.46) 14.5,4.46 14.5,2.6 14.5,0.006 26.5,0.006

## Keep-outs
L1:
  region: 16.885,6.126 24.115,6.126 24.115,0.015 24.1,0 16.9,0 16.9,6.111

## Silkscreen, mask and mechanical layers (free items; w line width, h text height)
Top Overlay:
  lines w0.2: 14.1,23.7 14.1,29.5
  text "MH" at 12.97,41 h2
  text "ML" at 15.618,41 h2
  text "HH" at 23.155,41 h2
  text "HL" at 25.804,41 h2
  text "Rev 1.1" at 28,16.062 h2
Bottom Overlay:
  text "JLCJLCJLCJCL" at 1.714,23.2 h2 r270
Mechanical 4:
  the board outline again, w0.2